# Altium PCB PCB1.PcbDoc
Units mm, origin at the board's own origin, x right, y up, seen from the top; angles counter-clockwise.
Board outline 88.01 x 99.71 mm, 2 copper layers (Top Layer, Bottom Layer); 67 components, 42 nets, 186 pads, 10 vias.
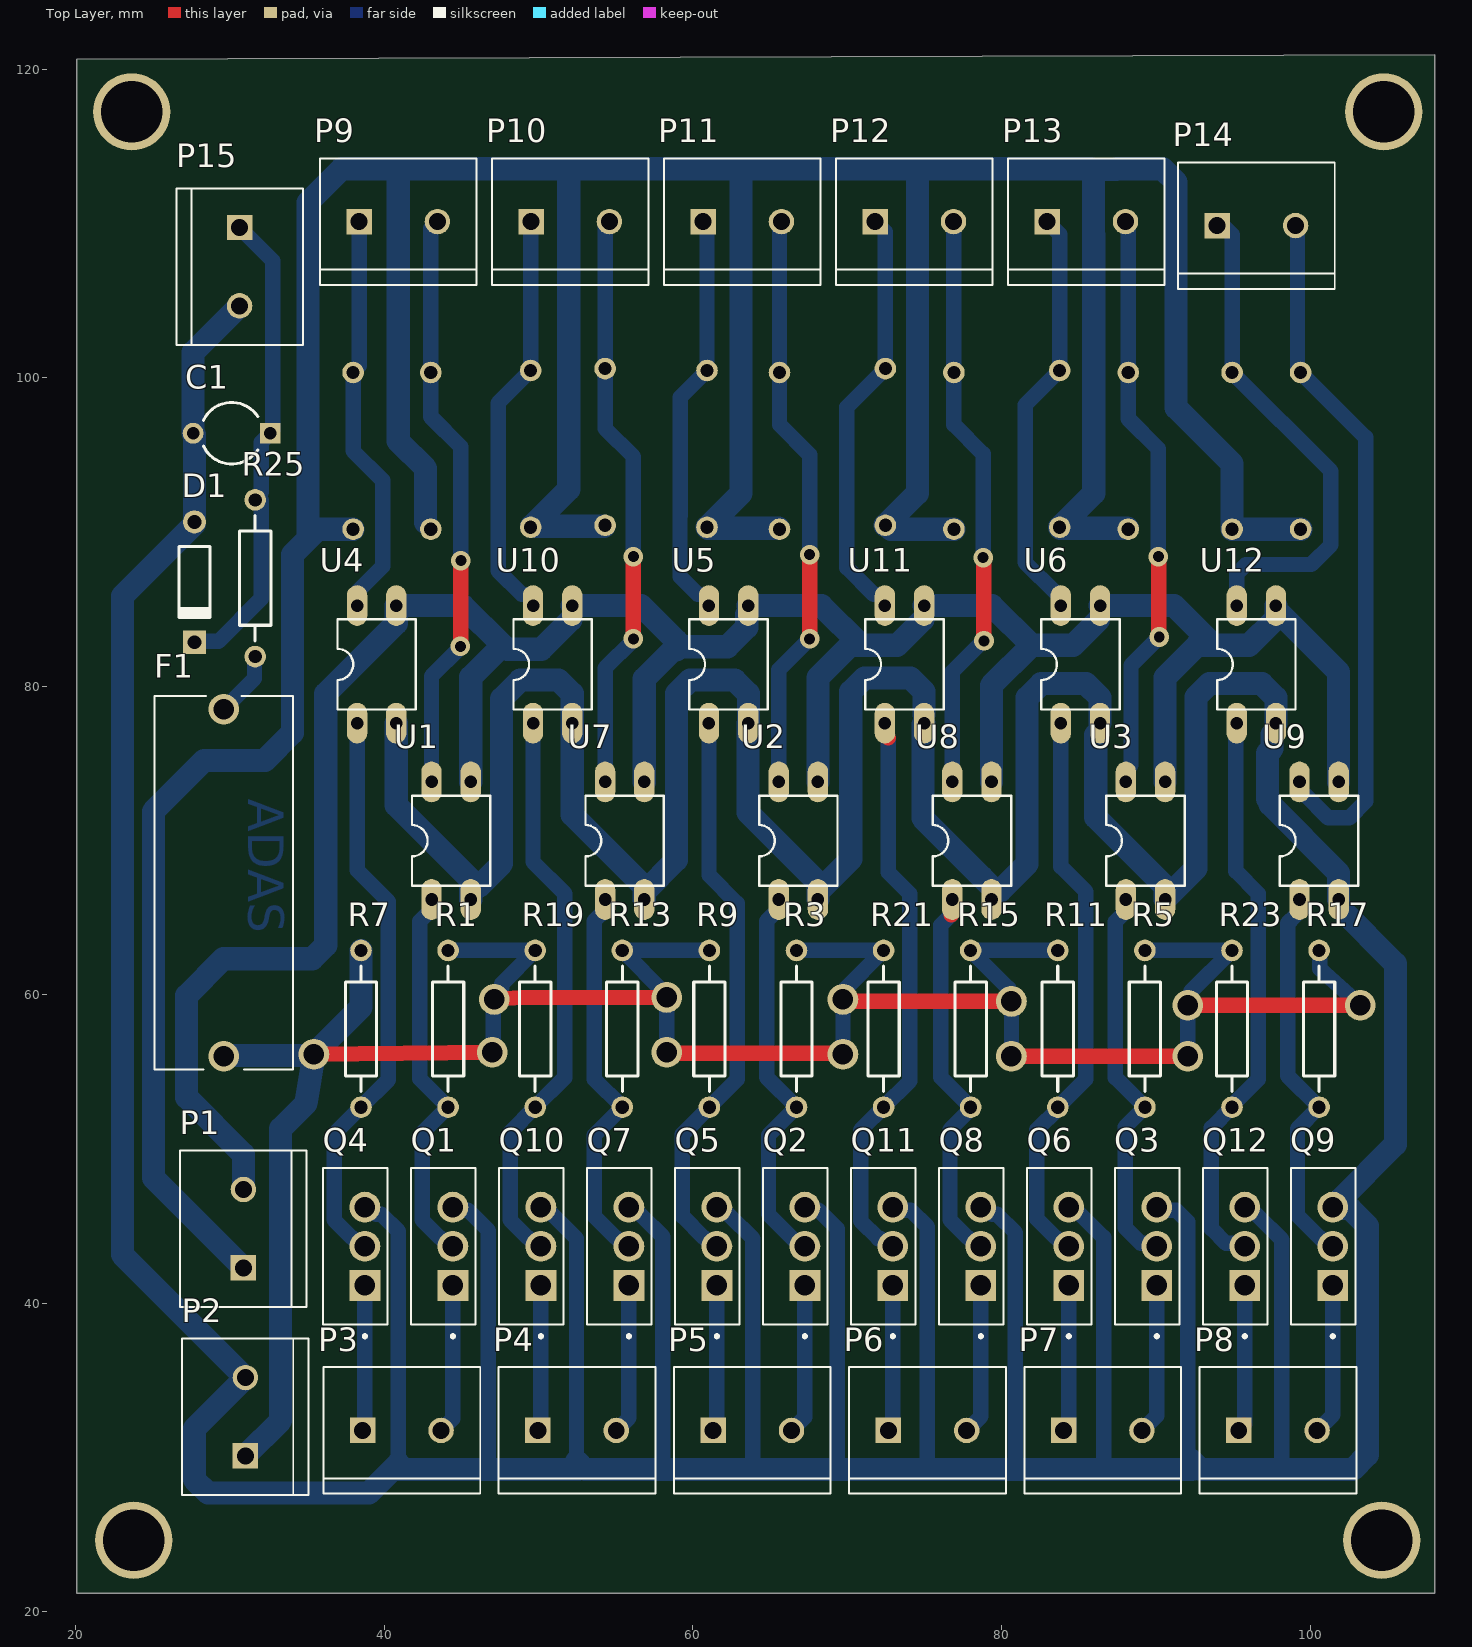
[diagram p0: Top Layer view]
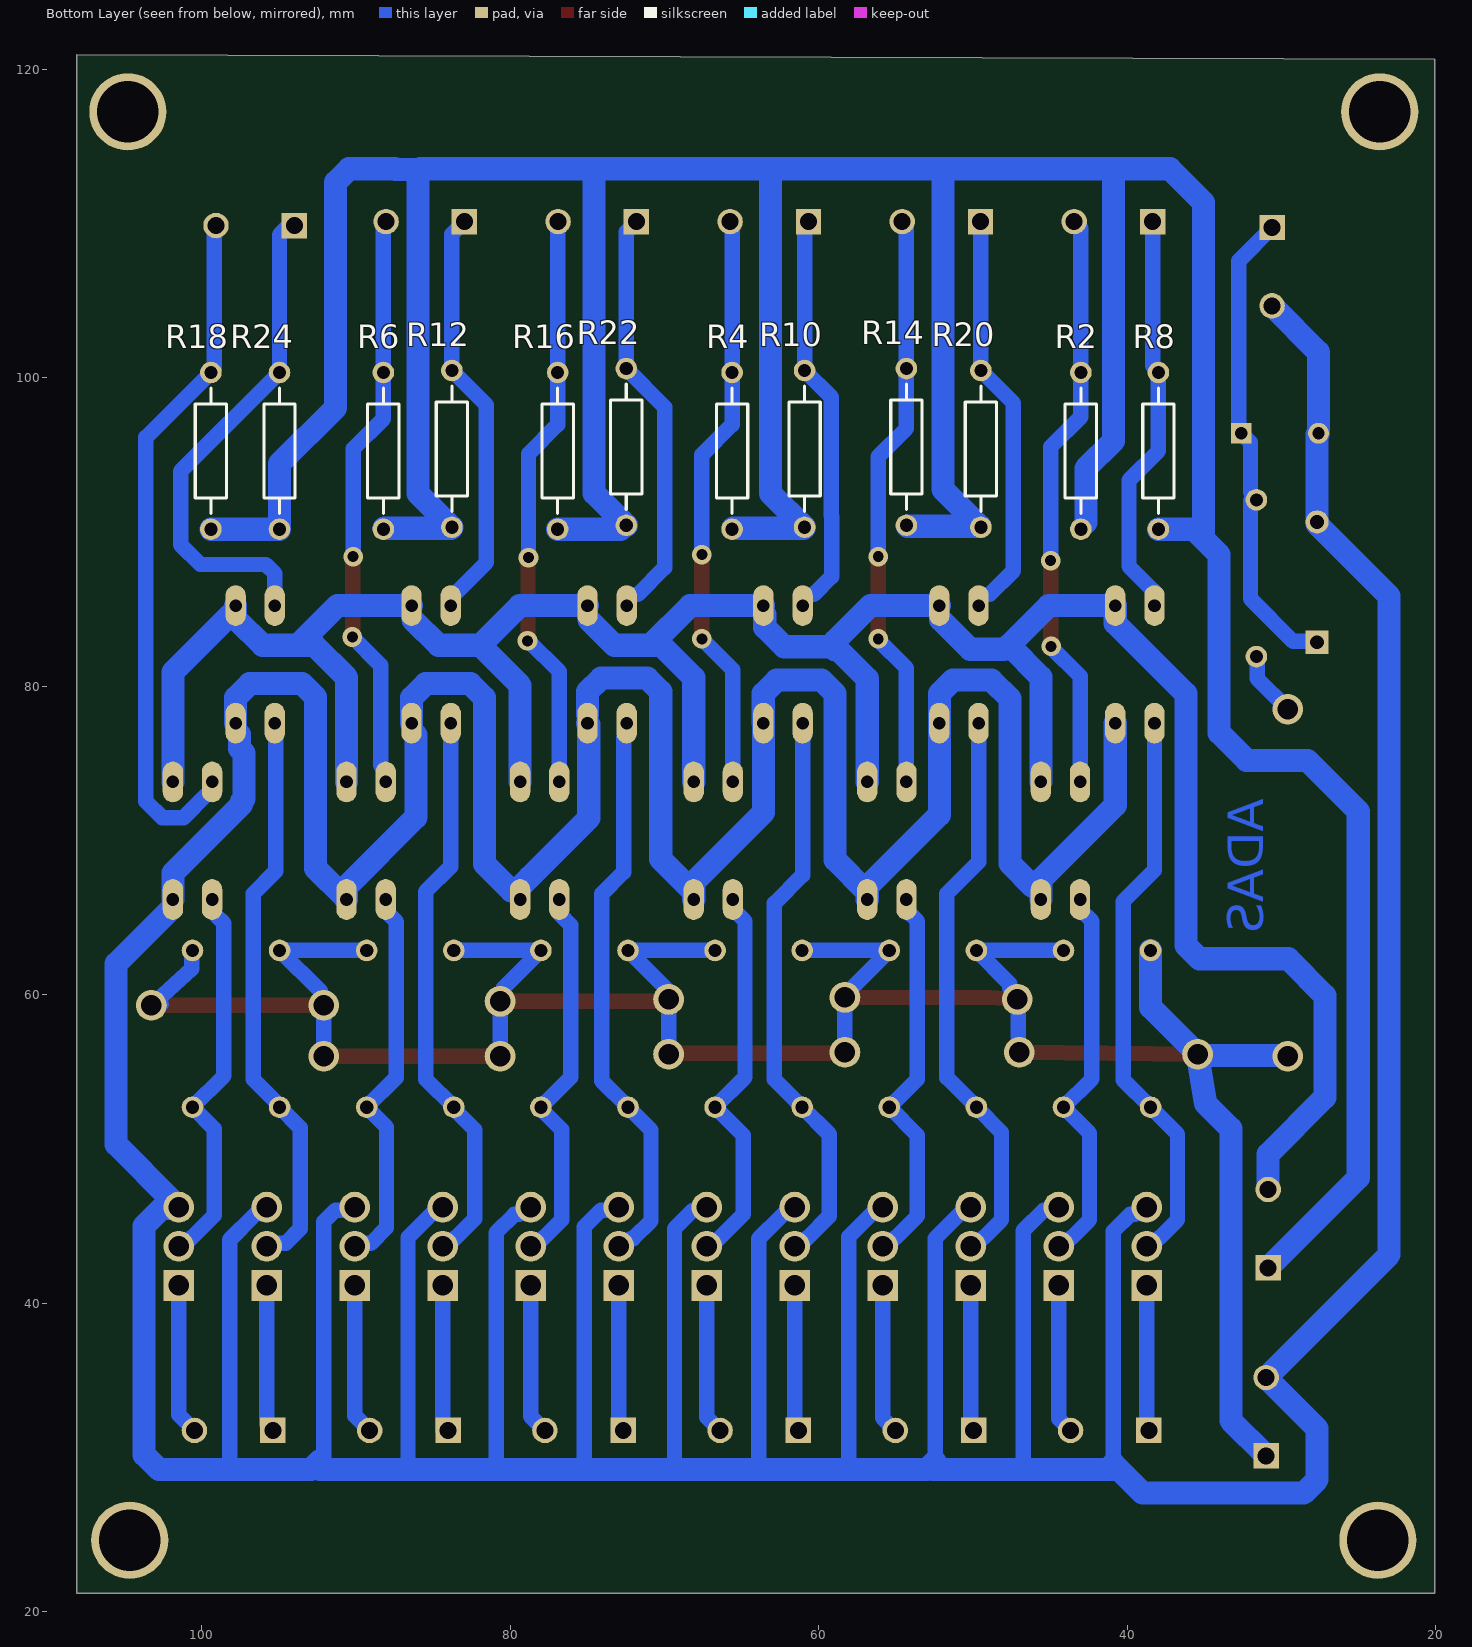
[diagram p1: Bottom Layer view, seen from below]
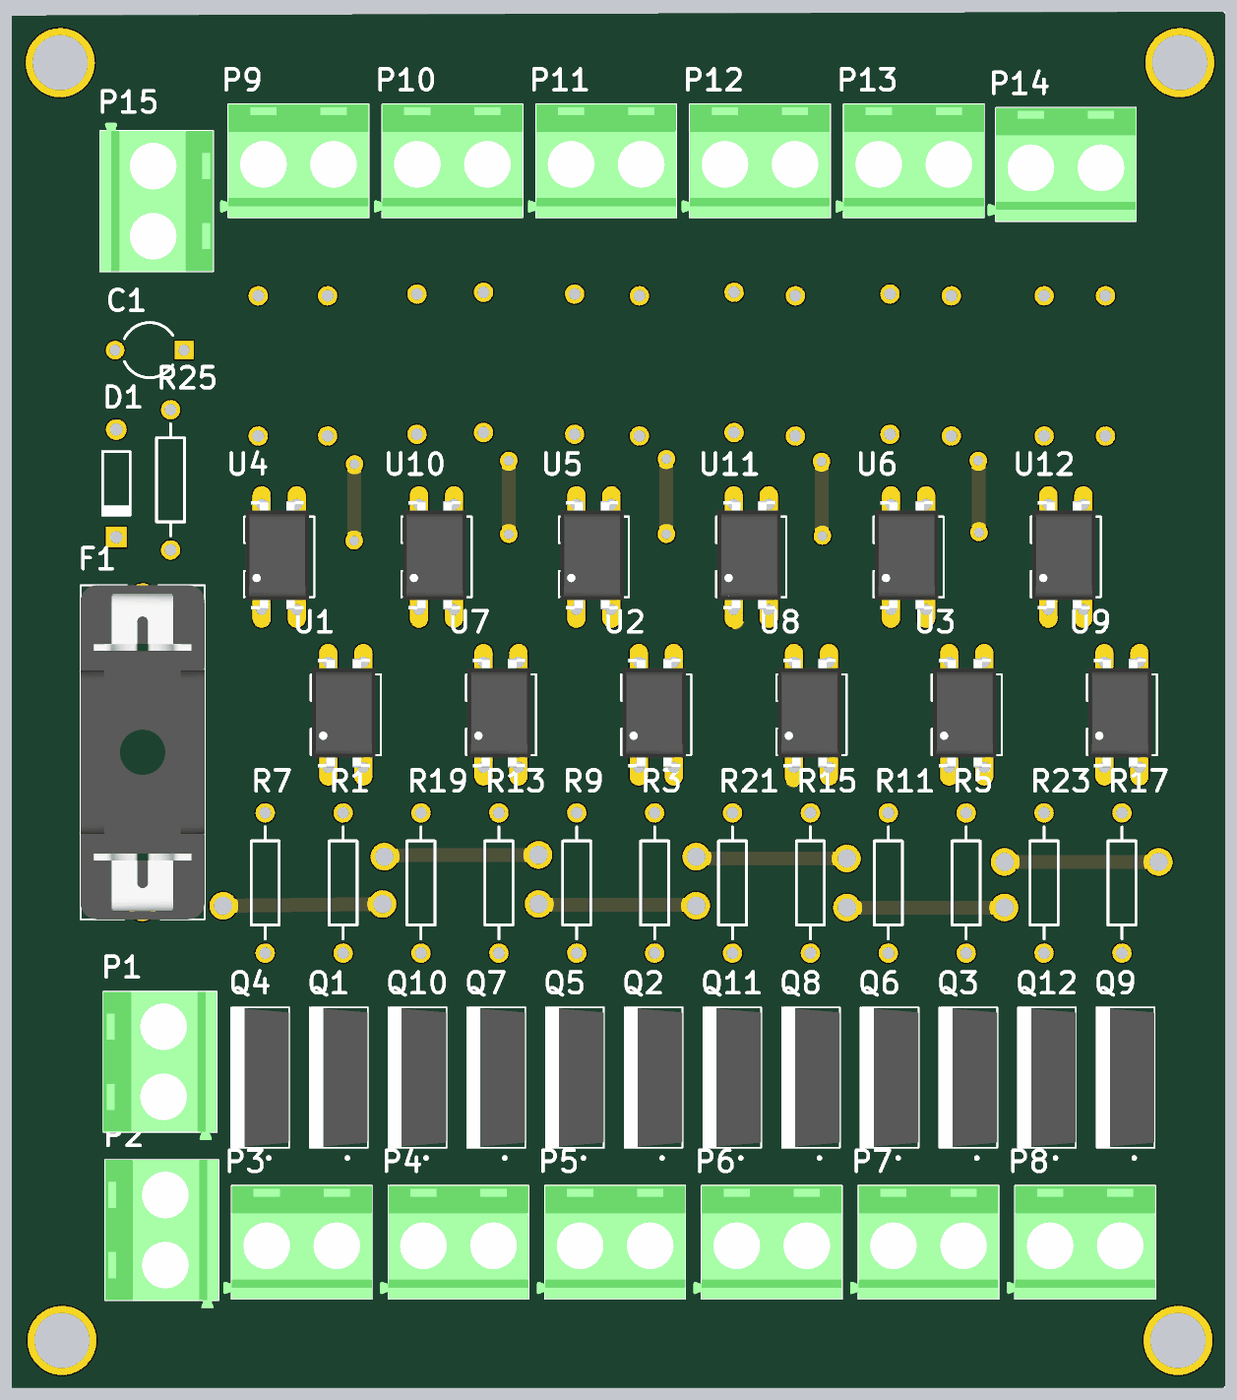
[diagram p2: 3D render of the assembled board from above, using the file's embedded part models]

## Layer stack, top to bottom
Top Solder: solder mask 0.0102, Solder Resist, Dk 3.5
Top Layer: signal copper 0.0356
Dielectric 1: dielectric 0.32, FR-4, Dk 4.8
Bottom Layer: signal copper 0.0356
Bottom Solder: solder mask 0.0102, Solder Resist, Dk 3.5

## Board outline
20.066,120.632 20.066,21.209 108.077,21.209 108.077,120.915

## Design rules (kind name [scope] priority, off if disabled: settings)
Clearance Clearance_9 [InNamedPolygon('GND_L01_P002')] p1: gap=0.8 ignorepadtopadclearanceinfootprint=FALSE
Clearance Clearance_8 [InNamedPolygon('NONET_L02_P002')] p2: gap=0.8 ignorepadtopadclearanceinfootprint=FALSE
Clearance Clearance_7 [InNamedPolygon('GND_L02_P001')] p3: gap=1 ignorepadtopadclearanceinfootprint=FALSE
Clearance Clearance_6 [InNamedPolygon('GND_L02_P000')] p4: gap=0.8 ignorepadtopadclearanceinfootprint=FALSE
Clearance Clearance_5 [InNamedPolygon('NONET_L02_P000')] p5: gap=0.8 ignorepadtopadclearanceinfootprint=FALSE
Clearance Clearance_4 [InNamedPolygon('NONET_L02_P000')] p6: gap=1 ignorepadtopadclearanceinfootprint=FALSE
Clearance Clearance_3 [InNamedPolygon('NONET_L02_P000')] p7: gap=0.8 ignorepadtopadclearanceinfootprint=FALSE
Clearance Clearance_2 [InNamedPolygon('NONET_L02_P000')] p8: gap=0.5 ignorepadtopadclearanceinfootprint=FALSE
Clearance Clearance_1 [InNamedPolygon('NONET_L02_P000')] p9: gap=0.3 ignorepadtopadclearanceinfootprint=FALSE
Clearance [All] p10: gap=0.5 ignorepadtopadclearanceinfootprint=FALSE
PolygonConnect PolygonConnect_6 [All vs IsNamedPolygon('GND_L01_P002')] p1: thpad.connectstyle=Relief thpad.reliefconductorwidth=1 thpad.reliefentries=4 thpad.polygonreliefangle="90 Angle" thpad.airgapwidth=0.8 smdpad.connectstyle=Relief smdpad.reliefconductorwidth=0.254 smdpad.reliefentries=4 smdpad.polygonreliefangle="90 Angle" smdpad.airgapwidth=0.254 via.connectstyle=Relief via.reliefconductorwidth=0.254 via.reliefentries=4 via.polygonreliefangle="90 Angle" via.airgapwidth=0.254
PolygonConnect PolygonConnect_5 [All vs IsNamedPolygon('NONET_L02_P002')] p2: thpad.connectstyle=Relief thpad.reliefconductorwidth=1 thpad.reliefentries=4 thpad.polygonreliefangle="90 Angle" thpad.airgapwidth=0.8 smdpad.connectstyle=Relief smdpad.reliefconductorwidth=0.254 smdpad.reliefentries=4 smdpad.polygonreliefangle="90 Angle" smdpad.airgapwidth=0.254 via.connectstyle=Relief via.reliefconductorwidth=0.254 via.reliefentries=4 via.polygonreliefangle="90 Angle" via.airgapwidth=0.254
PolygonConnect PolygonConnect_4 [All vs IsNamedPolygon('GND_L02_P001')] p3: thpad.connectstyle=Relief thpad.reliefconductorwidth=1 thpad.reliefentries=4 thpad.polygonreliefangle="45 Angle" thpad.airgapwidth=0.7 smdpad.connectstyle=Relief smdpad.reliefconductorwidth=0.254 smdpad.reliefentries=4 smdpad.polygonreliefangle="90 Angle" smdpad.airgapwidth=0.254 via.connectstyle=Relief via.reliefconductorwidth=0.254 via.reliefentries=4 via.polygonreliefangle="90 Angle" via.airgapwidth=0.254
PolygonConnect PolygonConnect_3 [All vs IsNamedPolygon('GND_L02_P001')] p4: thpad.connectstyle=Relief thpad.reliefconductorwidth=0.4 thpad.reliefentries=4 thpad.polygonreliefangle="45 Angle" thpad.airgapwidth=0.3 smdpad.connectstyle=Relief smdpad.reliefconductorwidth=0.254 smdpad.reliefentries=4 smdpad.polygonreliefangle="90 Angle" smdpad.airgapwidth=0.254 via.connectstyle=Relief via.reliefconductorwidth=0.254 via.reliefentries=4 via.polygonreliefangle="90 Angle" via.airgapwidth=0.254
PolygonConnect PolygonConnect_2 [All vs IsNamedPolygon('GND_L02_P001')] p5: thpad.connectstyle=Relief thpad.reliefconductorwidth=0.254 thpad.reliefentries=4 thpad.polygonreliefangle="90 Angle" thpad.airgapwidth=0.4 smdpad.connectstyle=Relief smdpad.reliefconductorwidth=0.254 smdpad.reliefentries=4 smdpad.polygonreliefangle="90 Angle" smdpad.airgapwidth=0.254 via.connectstyle=Relief via.reliefconductorwidth=0.254 via.reliefentries=4 via.polygonreliefangle="90 Angle" via.airgapwidth=0.254
PolygonConnect PolygonConnect_1 [All vs IsNamedPolygon('NONET_L02_P000')] p6: thpad.connectstyle=Relief thpad.reliefconductorwidth=0.254 thpad.reliefentries=4 thpad.polygonreliefangle="45 Angle" thpad.airgapwidth=0.254 smdpad.connectstyle=Relief smdpad.reliefconductorwidth=0.254 smdpad.reliefentries=4 smdpad.polygonreliefangle="90 Angle" smdpad.airgapwidth=0.254 via.connectstyle=Relief via.reliefconductorwidth=0.254 via.reliefentries=4 via.polygonreliefangle="90 Angle" via.airgapwidth=0.254
PolygonConnect [All] p7: connectstyle=Relief reliefconductorwidth=0.254 reliefentries=4 polygonreliefangle="90 Angle" airgapwidth=0.254
RoutingVias [All] p1: holewidth=0.711 width=1.27 viastyle="Through Hole" minholewidth=0.711 minwidth=1.27 maxholewidth=0.711 maxwidth=1.27
SolderMaskExpansion [All] p1: expansion=0.102 istentingtop=FALSE
Width [All] p1: maxlimit=1.5 minlimit=1 preferedwidth=1 minimp=50.000000 maximp=50.000000 favimp=50.000000
30 further rules are at their usual default settings.

## Components (designator, comment, footprint, x,y, rotation, side; value= is the part's Value field where it differs from the comment)
C1 "Cap2" CAPR5-4X5 30.099,96.393 r180 top value=100pF
D1 "Diode 1N4149" DO-35A 27.686,86.741 r270 top
F1 "4628" FUSE_4628 29.591,67.257 r90 top
P1 "282837-2" TE_282837-2 30.861,44.831 r90 top
P2 "282837-2" TE_282837-2 30.988,32.639 r90 top
P3 "282837-2" TE_282837-2 41.13,31.75 r0 top
P4 "282837-2" TE_282837-2 52.487,31.75 r0 top
P5 "282837-2" TE_282837-2 63.845,31.75 r0 top
P6 "282837-2" TE_282837-2 75.202,31.75 r0 top
P7 "282837-2" TE_282837-2 86.56,31.75 r0 top
P8 "282837-2" TE_282837-2 97.917,31.75 r0 top
P9 "282837-2" TE_282837-2 40.894,110.109 r0 top
P10 "282837-2" TE_282837-2 52.045,110.109 r0 top
P11 "282837-2" TE_282837-2 63.195,110.109 r0 top
P12 "282837-2" TE_282837-2 74.346,110.109 r0 top
P13 "282837-2" TE_282837-2 85.496,110.109 r0 top
P14 "282837-2" TE_282837-2 96.52,109.855 r0 top
P15 "282837-2" TE_282837-2 30.607,107.188 r270 top
Q1 "IRFZ44N" TO254P1016X419X2286-3 44.438,43.688 r90 top
Q2 "IRFZ44N" TO254P1016X419X2286-3 67.252,43.688 r90 top
Q3 "IRFZ44N" TO254P1016X419X2286-3 90.066,43.688 r90 top
Q4 "IRFZ44N" TO254P1016X419X2286-3 38.735,43.688 r90 top
Q5 "IRFZ44N" TO254P1016X419X2286-3 61.549,43.688 r90 top
Q6 "IRFZ44N" TO254P1016X419X2286-3 84.363,43.688 r90 top
Q7 "IRFZ44N" TO254P1016X419X2286-3 55.845,43.688 r90 top
Q8 "IRFZ44N" TO254P1016X419X2286-3 78.659,43.688 r90 top
Q9 "IRFZ44N" TO254P1016X419X2286-3 101.473,43.688 r90 top
Q10 "IRFZ44N" TO254P1016X419X2286-3 50.142,43.688 r90 top
Q11 "IRFZ44N" TO254P1016X419X2286-3 72.956,43.688 r90 top
Q12 "IRFZ44N" TO254P1016X419X2286-3 95.77,43.688 r90 top
R1 "Res2" AXIAL-0.4 44.127,57.785 r90 top value=1K
R2 "Res2" AXIAL-0.4 43.003,95.25 r270 bottom value=1K
R3 "Res2" AXIAL-0.4 66.71,57.785 r90 top value=1K
R4 "Res2" AXIAL-0.4 65.609,95.25 r270 bottom value=1K
R5 "Res2" AXIAL-0.4 89.293,57.785 r90 top value=1K
R6 "Res2" AXIAL-0.4 88.215,95.25 r270 bottom value=1K
R7 "Res2" AXIAL-0.4 38.481,57.785 r90 top value=1K
R8 "Res2" AXIAL-0.4 37.973,95.25 r270 bottom value=1K
R9 "Res2" AXIAL-0.4 61.064,57.785 r90 top value=1K
R10 "Res2" AXIAL-0.4 60.91,95.377 r270 bottom value=1K
R11 "Res2" AXIAL-0.4 83.647,57.785 r90 top value=1K
R12 "Res2" AXIAL-0.4 83.77,95.377 r270 bottom value=1K
R13 "Res2" AXIAL-0.4 55.418,57.785 r90 top value=1K
R14 "Res2" AXIAL-0.4 54.306,95.504 r270 bottom value=1K
R15 "Res2" AXIAL-0.4 78.001,57.785 r90 top value=1K
R16 "Res2" AXIAL-0.4 76.912,95.25 r270 bottom value=1K
R17 "Res2" AXIAL-0.4 100.584,57.785 r90 top value=1K
R18 "Res2" AXIAL-0.4 99.391,95.25 r270 bottom value=1K
R19 "Res2" AXIAL-0.4 49.772,57.785 r90 top value=1K
R20 "Res2" AXIAL-0.4 49.48,95.377 r270 bottom value=1K
R21 "Res2" AXIAL-0.4 72.355,57.785 r90 top value=1K
R22 "Res2" AXIAL-0.4 72.467,95.504 r270 bottom value=1K
R23 "Res2" AXIAL-0.4 94.938,57.785 r90 top value=1K
R24 "Res2" AXIAL-0.4 94.946,95.25 r270 bottom value=1K
R25 "Res2" AXIAL-0.4 31.623,86.995 r270 top value=1K
U1 "PC817X3NSZ9F" DIL04 44.323,69.977 r0 top
U2 "PC817X3NSZ9F" DIL04 66.827,69.977 r0 top
U3 "PC817X3NSZ9F" DIL04 89.332,69.977 r0 top
U4 "PC817X3NSZ9F" DIL04 39.497,81.407 r0 top
U5 "PC817X3NSZ9F" DIL04 62.306,81.407 r0 top
U6 "PC817X3NSZ9F" DIL04 85.115,81.407 r0 top
U7 "PC817X3NSZ9F" DIL04 55.575,69.977 r0 top
U8 "PC817X3NSZ9F" DIL04 78.08,69.977 r0 top
U9 "PC817X3NSZ9F" DIL04 100.584,69.977 r0 top
U10 "PC817X3NSZ9F" DIL04 50.902,81.407 r0 top
U11 "PC817X3NSZ9F" DIL04 73.711,81.407 r0 top
U12 "PC817X3NSZ9F" DIL04 96.52,81.407 r0 top

## Footprints (in the part's own frame and the unit in brackets; to place one, negate y for a bottom-side part, rotate by r counter-clockwise, add the part's x,y. Pads: shape width x height; smd on the part's side, far side on the other; paste and mask are expansions set on the pad)
AXIAL-0.4 [mm] "Axial Device, Thru-Hole; 2 Leads; 0.4 in Pin Spacing"
  round 1.4 hole 0.85: 1(-5.08,0) 2(5.08,0)
  silkscreen extent -4.06,-1.02 4.06,1.02
CAPR5-4X5 [mm] "Capacitor; 2 Leads"
  rect 1.35x1.35 hole 0.8: 1(-2.5,0)
  round 1.35 hole 0.8: 2(2.5,0)
  silkscreen extent -1.69,-2 1.82,2
DIL04 [mil]
  oval 52x104 hole 32: 1(-50,-150) 2(50,-150) 3(50,150) 4(-50,150)
  silkscreen extent -100,-115 100,115, body extent -96,-150 85,160, height 179
DO-35A [mm] "Diode, Axial; Body 4.6 x 1.9 mm (LxDia. max), Lead Dia. 0.53 mm (max)"
  round 1.5 hole 0.9: 1(-3.9,0)
  rect 1.5x1.5 hole 0.9: 2(3.9,0)
  silkscreen extent -2.3,-1 2.4,1
FUSE_4628 [mm]
  round 1.98 hole 1.32: 1(-11.25,0) 2(11.25,0)
  silkscreen extent -12.1,-4.49 12.1,4.49, body extent -12.1,-4.5 12.1,4.5, height 11.99
TE_282837-2 [mm]
  rect 1.65x1.65 / inner round 1.65 / far side rect 1.65x1.65 hole 1.1: 1(-2.54,0)
  round 1.65 hole 1.1: 2(2.54,0)
  silkscreen extent -5.08,-4.1 5.08,4.1, body extent -5.68,-4.1 5.08,4.1, height 10
TO254P1016X419X2286-3 [mm]
  rect 1.995x1.995 / inner round 1.995 / far side rect 1.995x1.995 hole 1.33: 1(-2.54,0)
  round 1.995 hole 1.33: 2(0,0) 3(2.54,0)
  silkscreen extent -5.93,-1.48 5.08,2.72, body extent -5.08,-1.47 5.08,2.72, height 22.86

## Part data
C1: "Capacitor", PackageDescription="Capacitor; 2 Leads", PackageReference=CAPR5-4X5, Published=23-Sep-2002, Publisher="Altium Limited"
D1: "Computer Diode", Code_JEDEC=DO-204-AH, ComponentLink1Description="Manufacturer Link", ComponentLink1URL=http://www.national.com/, DatasheetVersion=1989, LatestRevisionDate=17-Jul-2002, LatestRevisionNote="Re-released for DXP Platform.", PackageDescription="Diode, Axial; Body 4.6 x 1.9 mm (LxDia. max), Lead Dia. 0.53 mm (max)", PackageReference=DO-35A, PackageVersion=1989, Published=8-Jun-2000, Publisher="Altium Limited"
F1: "5mm Slim Line Fuse holder", Package=None, Check_prices=https://www.snapeda.com/parts/4628/Keystone/view-part/?ref=eda, MF=Keystone, MP=4628, SnapEDA_Link=https://www.snapeda.com/parts/4628/Keystone/view-part/?ref=snap
P1 P2 P3 P4 P5 P6 P7 P8 P9 P10 P11 P12 P13 P14 P15: "Ð Ð°Ð·ÑŠÐµÐ¼Ð½Ñ‹Ðµ ÐºÐ»ÐµÐ¼Ð¼Ð½Ñ‹Ðµ ÐºÐ¾Ð»Ð¾Ð´ÐºÐ¸ Ð Ð¾Ð·ÐµÑ‚ÐºÐ° 2 Ð¿Ð¾Ð»Ð¾Ð¶ÐµÐ½Ð¸Ñ 5,08 Ð¼Ð¼ ÐŸÑ€Ð¸Ð¿Ð¾Ð¹ Ð¿Ñ€ÑÐ¼Ð¾Ð¹ Ñ‡ÐµÑ€ÐµÐ· Ð¾Ñ‚Ð²ÐµÑ€ÑÑ‚Ð¸Ðµ 13,5 Ð / ÐºÐ¾Ð½Ñ‚Ð°ÐºÑ‚", Package=None, Availability="In Stock", Check_prices=https://www.snapeda.com/parts/282837-2/TE+Connectivity+AMP+Connectors/view-part/?ref=eda, MF="TE Connectivity", MP=282837-2, Price=None, Purchase-URL=https://pricing.snapeda.com/search/part/282837-2/?ref=eda, SnapEDA_Link=https://www.snapeda.com/parts/282837-2/TE+Connectivity+AMP+Connectors/view-part/?ref=snap
Q1 Q2 Q3 Q4 Q5 Q6 Q7 Q8 Q9 Q10 Q11 Q12: "N-Channel 55 V 49A (Tc) 94W (Tc) Through Hole TO-220AB", Package="TO-220-3 Infineon", Availability="In Stock", Check_prices=https://www.snapeda.com/parts/IRFZ44N/Infineon+Technologies/view-part/?ref=eda, MF="Infineon Technologies", MP=IRFZ44N, Price=None, Purchase-URL=https://pricing.snapeda.com/search/part/IRFZ44N/?ref=eda, SnapEDA_Link=https://www.snapeda.com/parts/IRFZ44N/Infineon+Technologies/view-part/?ref=snap
R1 R2 R3 R4 R5 R6 R7 R8 R9 R10 R11 R12 R13 R14 R15 R16 R17 R18 R19 R20 R21 R22 R23 R24 R25: "Resistor", LatestRevisionDate=17-Jul-2002, LatestRevisionNote="Re-released for DXP Platform.", PackageDescription="Axial Device, Thru-Hole; 2 Leads; 0.4 in Pin Spacing", PackageReference=AXIAL-0.4, Published=8-Jun-2000, Publisher="Altium Limited"
U1 U2 U3 U4 U5 U6 U7 U8 U9 U10 U11 U12: "Optoisolator Transistor Output 5000Vrms 1 Channel 4-DIP", Package="DIP-4 Sharp Microelectronics", Check_prices=https://www.snapeda.com/parts/PC817X3NSZ9F/Sharp+Microelectronics/view-part/?ref=eda, MF="Sharp Microelectronics", MP=PC817X3NSZ9F, SnapEDA_Link=https://www.snapeda.com/parts/PC817X3NSZ9F/Sharp+Microelectronics/view-part/?ref=snap

## Free pads (board coordinates)
  round 1.995 hole 1.33: 9(35.433,56.134) 9(46.99,56.261) 9(47.117,59.69) 9(58.293,56.261) 9(58.293,59.817) 9(69.723,56.134) 9(69.723,59.69) 9(80.645,56.007) 9(80.645,59.563) 9(92.075,56.007) 9(92.075,59.309) 9(103.251,59.309)
  round 5 hole 4: 10(23.622,117.221) 11(104.775,117.221) 12(23.749,24.638) 13(104.648,24.638)

## Via types
v1: diameter 1.27, hole 0.711, Top Layer to Bottom Layer, 10 vias

## Nets (pads, with @x,y where several pads share a name; then routed paths per layer and width w, separated by ;. In a path a pad name is that pad's centre, name@x,y a point inside that pad or via, vN(x,y) a via of type N, cw(c..) or ccw(c..) an arc to the next point about the centre after c; other vN are vias at no path point)
3.3: F1.1 P2.1 pad.9 R1.2 R3.2 R5.2 R7.2 R9.2 R11.2 R13.2 R15.2 R17.2 R19.2 R21.2 R23.2 | length 180
  Top Layer w1: pad.9@35.433,56.134 pad.9@46.99,56.261 ; pad.9@47.117,59.69 48.895,59.817 pad.9@58.293,59.817 ; pad.9@58.293,56.261 58.356,56.197 69.659,56.197 pad.9@69.723,56.134 ; pad.9@69.723,59.69 69.85,59.563 pad.9@80.645,59.563 ; pad.9@80.645,56.007 pad.9@92.075,56.007 ; pad.9@92.075,59.309 pad.9@103.251,59.309
  Bottom Layer w1: R1.2 R19.2 47.614,60.707 47.614,60.457 47.117,59.959 47.117,59.69 47.053,59.627 47.053,56.325 pad.9@46.99,56.261 ; pad.9@58.23,60.054 R13.2 R9.2 ; pad.9@58.293,56.261 pad.9@58.293,59.817 ; R3.2 R21.2 pad.9@69.773,60.283 ; pad.9@69.723,56.134 pad.9@69.723,59.69 ; pad.9@80.457,60.41 R15.2 R11.2 ; pad.9@80.645,56.007 pad.9@80.645,59.563 ; R5.2 R23.2 92.265,60.192 92.265,59.055 cw(c92.17,60.05) pad.9@92.075,59.055 ; pad.9@92.075,56.007 pad.9@92.075,59.055 ; pad.9@92.075,59.309 pad.9@92.075,59.055 ; R17.2 100.64,62.809 100.64,61.666 102.851,59.67 103.251,59.309 pad.9@102.598,59.39
  Bottom Layer w1.5: F1.1@29.651,56.067 pad.9@34.597,56.067 ; P2.1 33.274,32.385 33.274,51.308 34.925,52.959 35.433,56.134 38.481,59.182 R7.2
+5: P1.1 R2.2 R4.2 R6.2 R8.2 R10.2 R12.2 R14.2 R16.2 R18.2 R20.2 R22.2 R24.2 | length 305.8
  Bottom Layer w1: R2.2@42.672,90.61 43.003,90.278 R2.2 ; R20.2 R20.2@49.544,90.361 ; R14.2@54.243,90.361 R14.2 R14.2@54.383,90.347 ; R10.2 R10.2@60.974,90.233 ; R4.2@65.546,90.233 R4.2 ; R22.2 72.576,90.424 R22.2@72.83,90.17 ; R12.2 R12.2@83.834,90.233 ; R6.2@88.152,90.233 R6.2
  Bottom Layer w1.5: P1.1 25.019,48.133 25.019,71.882 28.321,75.184 32.258,75.184 34.036,76.962 34.036,88.529 35.052,89.545 ; R8.2 35.677,90.17 35.052,89.545 ; R2.2@42.672,90.61 42.672,94.107 40.894,95.885 40.894,113.538 ; 51.943,113.284 51.943,92.76 49.544,90.361 R14.2@54.243,90.361 ; R10.2 63.119,92.506 63.119,113.411 ; R10.2@60.974,90.233 R4.2@65.546,90.233 ; R22.2 74.549,92.506 74.549,113.284 ; R22.2@72.83,90.17 R16.2 ; R12.2 85.979,92.506 85.979,109.232 85.961,109.25 85.961,113.495 87.432,113.495 87.475,113.538 90.434,113.538 91.313,112.659 91.313,98.044 94.946,94.411 R24.2 R18.2 ; R12.2@83.834,90.233 R6.2@88.152,90.233 ; 85.811,113.538 74.549,113.538 63.119,113.538 51.943,113.538 40.894,113.538 ; 35.052,89.545 35.052,90.17 35.052,111.356 37.234,113.538 40.894,113.538
GND: C1.2 D1.1 P2.2 P15.2 Q1.3 Q2.3 Q3.3 Q4.3 Q5.3 Q6.3 Q7.3 Q8.3 Q9.3 Q10.3 Q11.3 Q12.3 U1.2 U2.2 U3.2 U4.2 U5.2 U6.2 U7.2 U8.2 U9.2 U10.2 U11.2 U12.2 | length 584.7
  Bottom Layer w1: D1.1@27.686,90.506 D1.1 ; Q4.3 39.004,46.228 39.471,45.761 39.8,45.761 40.894,44.667 40.894,29.591 40.894,29.21 ; Q1.3@44.533,46.133 44.629,46.038 45.402,46.038 46.736,44.704 46.736,29.21 ; Q10.3 50.411,46.228 50.909,45.731 50.924,45.731 52.139,44.515 52.139,44.508 52.451,44.196 52.451,29.741 ; Q7.3 56.115,46.228 56.657,45.685 56.673,45.685 58.039,44.319 58.039,29.21 ; Q5.3 61.818,46.228 62.361,45.685 62.376,45.685 63.881,44.181 63.881,29.21 ; Q2.3 67.443,46.038 68.135,46.038 69.342,44.831 69.342,29.21 ; Q11.3 73.146,46.038 74.104,46.038 75.184,44.958 75.184,29.21 ; Q8.3 78.928,46.228 79.4,45.756 79.72,45.756 80.899,44.577 80.899,29.21 ; Q6.3 84.632,46.228 85.174,45.685 85.19,45.685 86.614,44.262 86.614,29.21 ; Q3.3 90.256,46.038 91.317,46.038 92.064,45.291 92.064,29.293 ; Q12.3 96.039,46.228 96.581,45.685 96.597,45.685 98.171,44.111 98.171,29.415 98.376,29.21
  Bottom Layer w1.5: C1.2 27.599,101.64 P15.2 ; D1.1@27.686,90.506 23.019,85.839 23.019,43.148 P2.2 ; D1.1 C1.2@27.686,96.306 ; P2.2@30.959,35.15 27.686,31.877 27.686,28.565 28.565,27.686 38.989,27.686 40.894,29.591 ; U4.2 40.767,72.273 45.593,67.447 U1.2 ; 40.894,29.21 46.736,29.21 52.578,29.21 ; Q1.3 Q1.3@44.533,46.133 ; U1.2@46.07,66.97 47.593,68.493 47.593,79.182 48.802,80.391 51.293,80.391 52.172,79.512 U10.2 52.172,71.663 56.845,66.989 U7.2@56.845,66.648 ; 52.451,29.741 52.982,29.21 58.039,29.21 63.881,29.21 69.342,29.21 75.184,29.21 80.899,29.21 86.614,29.21 92.329,29.21 ; U7.2 U7.2@56.845,66.648 ; U2.2 U2.2@68.097,66.648 ; U11.2 74.899,77.515 74.899,71.44 78.72,67.619 78.72,67.616 79.599,66.738 79.92,66.738 81.661,68.478 81.661,79.258 82.57,80.168 85.476,80.168 86.385,79.258 U6.2 ; U11.2@74.981,78.168 74.981,79.639 74.102,80.518 71.11,80.518 70.231,79.639 70.231,68.782 U2.2@68.097,66.648 ; U6.2@86.296,77.026 86.106,76.836 86.106,71.501 90.602,67.005 U3.2 ; U3.2@90.759,66.334 92.602,68.177 92.602,79.289 93.48,80.168 96.881,80.168 97.79,79.258 U12.2 ; 92.329,29.796 92.915,29.21 98.376,29.21 102.753,29.21 103.72,30.177 103.72,45.013 102.601,46.133 101.568,46.133 Q9.3 ; U12.2@97.7,77.026 97.536,76.862 97.536,75.946 97.239,75.649 97.239,72.697 97.404,72.533 97.404,72.335 101.854,67.885 U9.2 ; Q9.3@101.854,46.609 105.537,50.292 105.537,62.003 U9.2@101.944,65.596 ; U7.2@56.845,66.648 58.928,68.731 58.928,79.512 59.807,80.391 62.71,80.391 63.588,79.512 63.588,77.609 U5.2 63.576,71.806 68.097,67.285 U2.2@68.097,66.648
GND5: P1.2 U1.3 U2.3 U3.3 U4.3 U5.3 U6.3 U7.3 U8.3 U9.3 U10.3 U11.3 U12.3 | length 178.7
  Bottom Layer w1.5: P1.2 30.861,49.657 27.178,53.34 27.178,59.944 29.559,62.325 35.316,62.325 36.195,63.204 36.195,79.502 40.767,84.074 U4.3 45.085,85.217 47.656,82.646 45.593,80.583 U1.3 ; 47.974,82.391 50.168,82.391 U10.3@52.082,84.305 ; U10.3 56.642,85.217 58.919,82.94 58.919,82.332 ; U7.3 56.845,80.476 58.919,82.55 62.23,82.55 63.487,83.807 U5.3@63.487,84.646 ; U5.3 68.326,85.217 70.897,82.646 ; U2.3 68.097,80.543 70.2,82.646 70.897,82.646 ; U11.3@74.891,84.305 73.232,82.646 70.897,82.646 ; U11.3 79.375,85.217 81.946,82.646 ; U8.3 79.35,80.05 81.946,82.646 ; U6.3@86.296,84.305 84.637,82.646 81.946,82.646 ; U6.3 91.186,85.217 93.343,83.06 93.757,82.646 ; U3.3 90.602,80.569 92.679,82.646 93.757,82.646 ; U12.3@97.7,84.305 96.041,82.646 93.757,82.646 ; U12.3@97.79,84.305 U12.3 ; U12.3@97.88,84.646 98.107,84.646 101.854,80.899 U9.3
NetC1_1: C1.1 D1.2 P15.1 R25.1 | length 30.7
  Top Layer w1: C1.1 C1.1@32.639,96.353
  Bottom Layer w1: D1.2 27.749,82.904 29.244,82.904 32.004,85.664 R25.1@32.004,92.056 ; P15.1 32.766,107.569 C1.1@32.766,96.568 ; R25.1@31.808,92.056 31.7,92.164 31.7,92.26 32.004,92.564 32.004,95.798 C1.1
NetF1_2: F1.2 R25.2 | length 4.2
  Bottom Layer w1: F1.2 31.577,80.493 31.577,81.869 R25.2
NetQ1_2: Q1.2 R1.1 U1.1 | length 25.5
  Top Layer w1: U1.1@43.053,65.522 U1.1 ; Q1.2@44.248,43.878 Q1.2
  Bottom Layer w1: U1.1@43.053,65.522 42.291,64.76 42.291,54.541 R1.1 42.441,51.019 42.441,45.401 43.611,44.231 43.627,44.231 44.169,43.688 Q1.2
NetQ2_2: Q2.2 R3.1 U2.1 | length 25.5
  Top Layer w1: U2.1@65.557,65.548 U2.1 ; Q2.2@67.109,43.831 Q2.2
  Bottom Layer w1: U2.1@65.557,65.548 64.77,64.76 64.77,54.645 R3.1 64.897,50.892 64.897,45.758 66.777,43.878 67.062,43.878 Q2.2@67.109,43.831
NetQ3_2: Q3.2 R5.1 U3.1 | length 25.4
  Top Layer w1: U3.1@88.062,65.42 U3.1 ; Q3.2@89.876,43.878 Q3.2
  Bottom Layer w1: U3.1@88.062,65.42 87.376,64.734 87.376,54.622 R5.1 88.011,51.423 88.011,44.895 89.028,43.878 Q3.2@89.876,43.878
NetQ4_2: Q4.2 R7.1 U4.1 | length 37.2
  Bottom Layer w1: U4.1 38.227,68.072 40.259,66.04 40.259,54.483 R7.1 36.738,50.962 36.738,45.401 37.908,44.231 37.923,44.231 38.466,43.688 Q4.2
NetQ5_2: Q5.2 R9.1 U5.1 | length 37.2
  Top Layer w1: Q5.2@61.358,43.878 Q5.2
  Bottom Layer w1: U5.1 61.036,67.742 62.865,65.913 62.865,54.506 R9.1 59.309,50.95 59.309,45.643 60.721,44.231 60.737,44.231 61.089,43.878 Q5.2@61.358,43.878
NetQ6_2: Q6.2 R11.1 U6.1 | length 36.9
  Top Layer w1: Q6.2@84.172,43.878 Q6.2
  Bottom Layer w1: U6.1 83.845,68.301 85.471,66.675 85.471,54.529 R11.1 83.647,52.597 82.296,51.246 82.296,45.47 83.535,44.231 83.551,44.231 83.903,43.878 Q6.2@84.172,43.878
NetQ7_2: Q7.2 R13.1 U7.1 | length 26.1
  Top Layer w1: U7.1@54.305,65.42 U7.1 ; Q7.2@55.655,43.878 Q7.2
  Bottom Layer w1: U7.1 54.305,65.472 53.594,64.76 53.594,54.529 R13.1 53.594,50.881 53.594,45.654 55.018,44.231 55.034,44.231 55.386,43.878 Q7.2@55.655,43.878
NetQ8_2: Q8.2 R15.1 U8.1 | length 25.1
  Top Layer w1: U8.1@76.748,65.191 76.748,66.106 U8.1 ; Q8.2@78.469,43.878 Q8.2
  Bottom Layer w1: U8.1@76.748,65.191 76.073,64.516 76.073,54.633 R15.1 78.001,52.597 76.662,51.257 76.662,45.401 77.832,44.231 77.847,44.231 78.2,43.878 Q8.2@78.469,43.878
NetQ9_2: Q9.2 R17.1 U9.1 | length 25.2
  Top Layer w1: U9.1@99.314,65.42 U9.1 ; Q9.2@101.204,43.688 Q9.2
  Bottom Layer w1: U9.1@99.06,65.137 98.552,64.629 98.552,54.737 R17.1 99.187,51.308 99.187,45.689 100.646,44.231 100.661,44.231 101.204,43.688 Q9.2
NetQ10_2: Q10.2 R19.1 U10.1 | length 37.2
  Bottom Layer w1: U10.1 49.632,68.605 51.689,66.548 51.689,54.622 R19.1 48.144,51.077 48.144,45.401 49.314,44.231 49.33,44.231 49.873,43.688 Q10.2
NetQ11_2: Q11.2 R21.1 U11.1 | length 37.1
  Top Layer w1: U11.1 72.441,76.85 U11.1@72.644,76.647 ; Q11.2@72.928,43.716 Q11.2
  Bottom Layer w1: R21.1 74.055,54.405 74.055,66.534 72.644,67.945 U11.1@72.644,76.647 ; R21.1@72.432,52.782 70.866,51.216 70.866,45.339 72.02,44.185 72.189,44.185 72.658,43.716 Q11.2@72.928,43.716
NetQ12_2: Q12.2 R23.1 U12.1 | length 37.3
  Top Layer w1: R23.1 R23.1@94.938,52.813 ; Q12.2@95.579,43.878 Q12.2
  Bottom Layer w1: R23.1 93.599,51.366 93.599,44.831 94.552,43.878 Q12.2@95.579,43.878 ; R23.1@94.938,52.813 96.638,54.513 96.638,66.557 95.189,68.006 95.189,77.536 U12.1
o1: P9.2 R2.1 U1.4 | length 38.1
  Top Layer w1: v1(44.926,82.582) 44.942,82.598 44.942,88.122 v1(44.958,88.138)
  Bottom Layer w1: U1.4 43.053,80.645 44.926,82.518 v1(44.926,82.582) ; P9.2 43.003,109.678 R2.1 43.003,97.459 44.958,95.504 v1(44.958,88.138)
o2: P9.1 R8.1 U4.4 | length 26.5
  Top Layer w1: U4.4 U4.4@38.288,85.278
  Bottom Layer w1: R8.1 37.973,95.25 39.878,93.345 39.878,87.757 38.288,86.167 38.288,85.278 U4.4 ; R8.1@38.05,100.457 38.354,100.761 P9.1
o3: P10.2 R14.1 U7.4 | length 38
  Top Layer w1: v1(56.134,83.058) v1(56.134,88.392)
  Bottom Layer w1: U7.4 54.305,81.16 56.134,82.989 v1(56.134,83.058) ; P10.2 54.306,109.831 R14.1 54.306,96.697 56.134,94.869 v1(56.134,88.392)
o4: P10.1 R20.1 U10.4 | length 27
  Bottom Layer w1: P10.1 49.48,110.085 R20.1 47.371,98.348 47.371,87.478 48.91,85.939 49.483,85.939 49.632,85.791 U10.4
o5: P11.2 R4.1 U2.4 | length 38
  Top Layer w1: v1(67.564,83.058) v1(67.564,88.519)
  Bottom Layer w1: U2.4 65.557,81.051 v1(67.564,83.058) ; P11.2 65.609,109.983 R4.1 65.609,96.951 67.564,94.996 v1(67.564,88.519)
o6: P11.1 R10.1 U5.4 | length 26.8
  Bottom Layer w1: P11.1 60.91,109.854 R10.1 59.182,98.729 59.182,91.043 59.16,91.022 59.16,87.093 60.314,85.939 60.888,85.939 61.036,85.791 U5.4
o7: P12.2 R16.1 U8.4 | length 38
  Top Layer w1: v1(78.803,88.328) 78.835,88.297 78.835,82.963 v1(78.867,82.931)
  Bottom Layer w1: U8.4 76.81,80.947 78.794,82.931 v1(78.867,82.931) ; P12.2 76.912,110.082 R16.1 76.912,96.951 78.803,95.059 v1(78.803,88.328)
o8: P12.1 R22.1 U11.4 | length 27.6
  Bottom Layer w1: P12.1 72.467,109.447 R22.1 69.977,98.094 69.977,87.681 71.719,85.939 72.293,85.939 72.441,85.791 U11.4
o9: P13.2 R6.1 U3.4 | length 38.1
  Top Layer w1: v1(90.17,88.392) 90.197,88.365 90.197,83.212 v1(90.224,83.185)
  Bottom Layer w1: P13.2 88.215,109.93 R6.1 88.215,97.332 90.17,95.377 v1(90.17,88.392) ; U3.4 88.062,74.534 88.392,74.864 88.392,81.353 v1(90.224,83.185)
o10: P13.1 R12.1 U6.4 | length 27.2
  Bottom Layer w1: P13.1 83.77,109.295 R12.1 81.534,98.221 81.534,88.021 83.517,86.038 83.598,86.038 83.845,85.791 U6.4
o11: P14.2 R18.1 U9.4 | length 46
  Top Layer w1: U9.4 U9.4@99.314,74.361
  Bottom Layer w1: P14.2@99.187,110.109 99.187,100.534 R18.1 103.604,96.117 103.604,72.528 102.542,71.466 101.166,71.466 99.666,72.966 99.561,72.966 99.314,73.213 U9.4
o12: P14.1 R24.1 U12.4 | length 32.9
  Bottom Layer w1: P14.1@94.107,110.109 94.946,109.27 R24.1 101.346,93.93 101.346,89.154 100.076,87.884 95.836,87.884 95.25,87.298 U12.4
p1: P3.2 Q1.1 | length 9.7
  Bottom Layer w1: P3.2 44.438,32.519 Q1.1
p2: P3.1 Q4.1 | length 9.5
  Top Layer w1: P3.1 P3.1@38.735,31.895
  Bottom Layer w1: P3.1@38.735,31.895 Q4.1
p3: P4.2 Q7.1 | length 9.7
  Bottom Layer w1: P4.2 55.845,32.568 Q7.1
p4: P4.1 Q10.1 | length 9.5
  Top Layer w1: P4.1 P4.1@50.142,31.945
  Bottom Layer w1: P4.1@50.142,31.945 Q10.1
p5: P5.2 Q2.1 | length 9.8
  Bottom Layer w1: P5.2 67.252,32.618 Q2.1
p6: P5.1 Q5.1 | length 9.5
  Top Layer w1: P5.1 P5.1@61.549,31.994
  Bottom Layer w1: P5.1@61.549,31.994 Q5.1
p7: P6.2 Q8.1 | length 9.8
  Bottom Layer w1: P6.2 78.659,32.667 Q8.1
p8: P6.1 Q11.1 | length 9.5
  Top Layer w1: P6.1 P6.1@72.956,32.044
  Bottom Layer w1: P6.1@72.956,32.044 Q11.1
p9: P7.2 Q3.1 | length 9.8
  Bottom Layer w1: P7.2 90.066,32.717 Q3.1
p10: P7.1 Q6.1 | length 9.6
  Top Layer w1: P7.1 P7.1@84.179,31.91
  Bottom Layer w1: P7.1@84.363,31.75 Q6.1
p11: P8.2 Q9.1 | length 9.8
  Bottom Layer w1: P8.2 101.473,32.766 Q9.1
p12: P8.1 Q12.1 | length 10
  Top Layer w1: P8.1 P8.1@95.702,32.075
  Bottom Layer w1: P8.1 95.702,32.075 95.77,32.143 Q12.1

## Other copper
Bottom Layer:
  text "ADAS" at 31.18,72.706 h2.3 r270

## Dimensions
108.077,120.915 to 108.077,21.209 on Top Overlay
108.077,120.915 to 20.066,120.632 on Top Overlay